# Altium PCB Copy of PCB1.PcbDoc
Units mm, origin at the board's own origin, x right, y up, seen from the top; angles counter-clockwise.
Board outline 71.25 x 85.34 mm, 2 copper layers (Top Layer, Bottom Layer); 17 components, 27 nets, 119 pads, 0 vias.
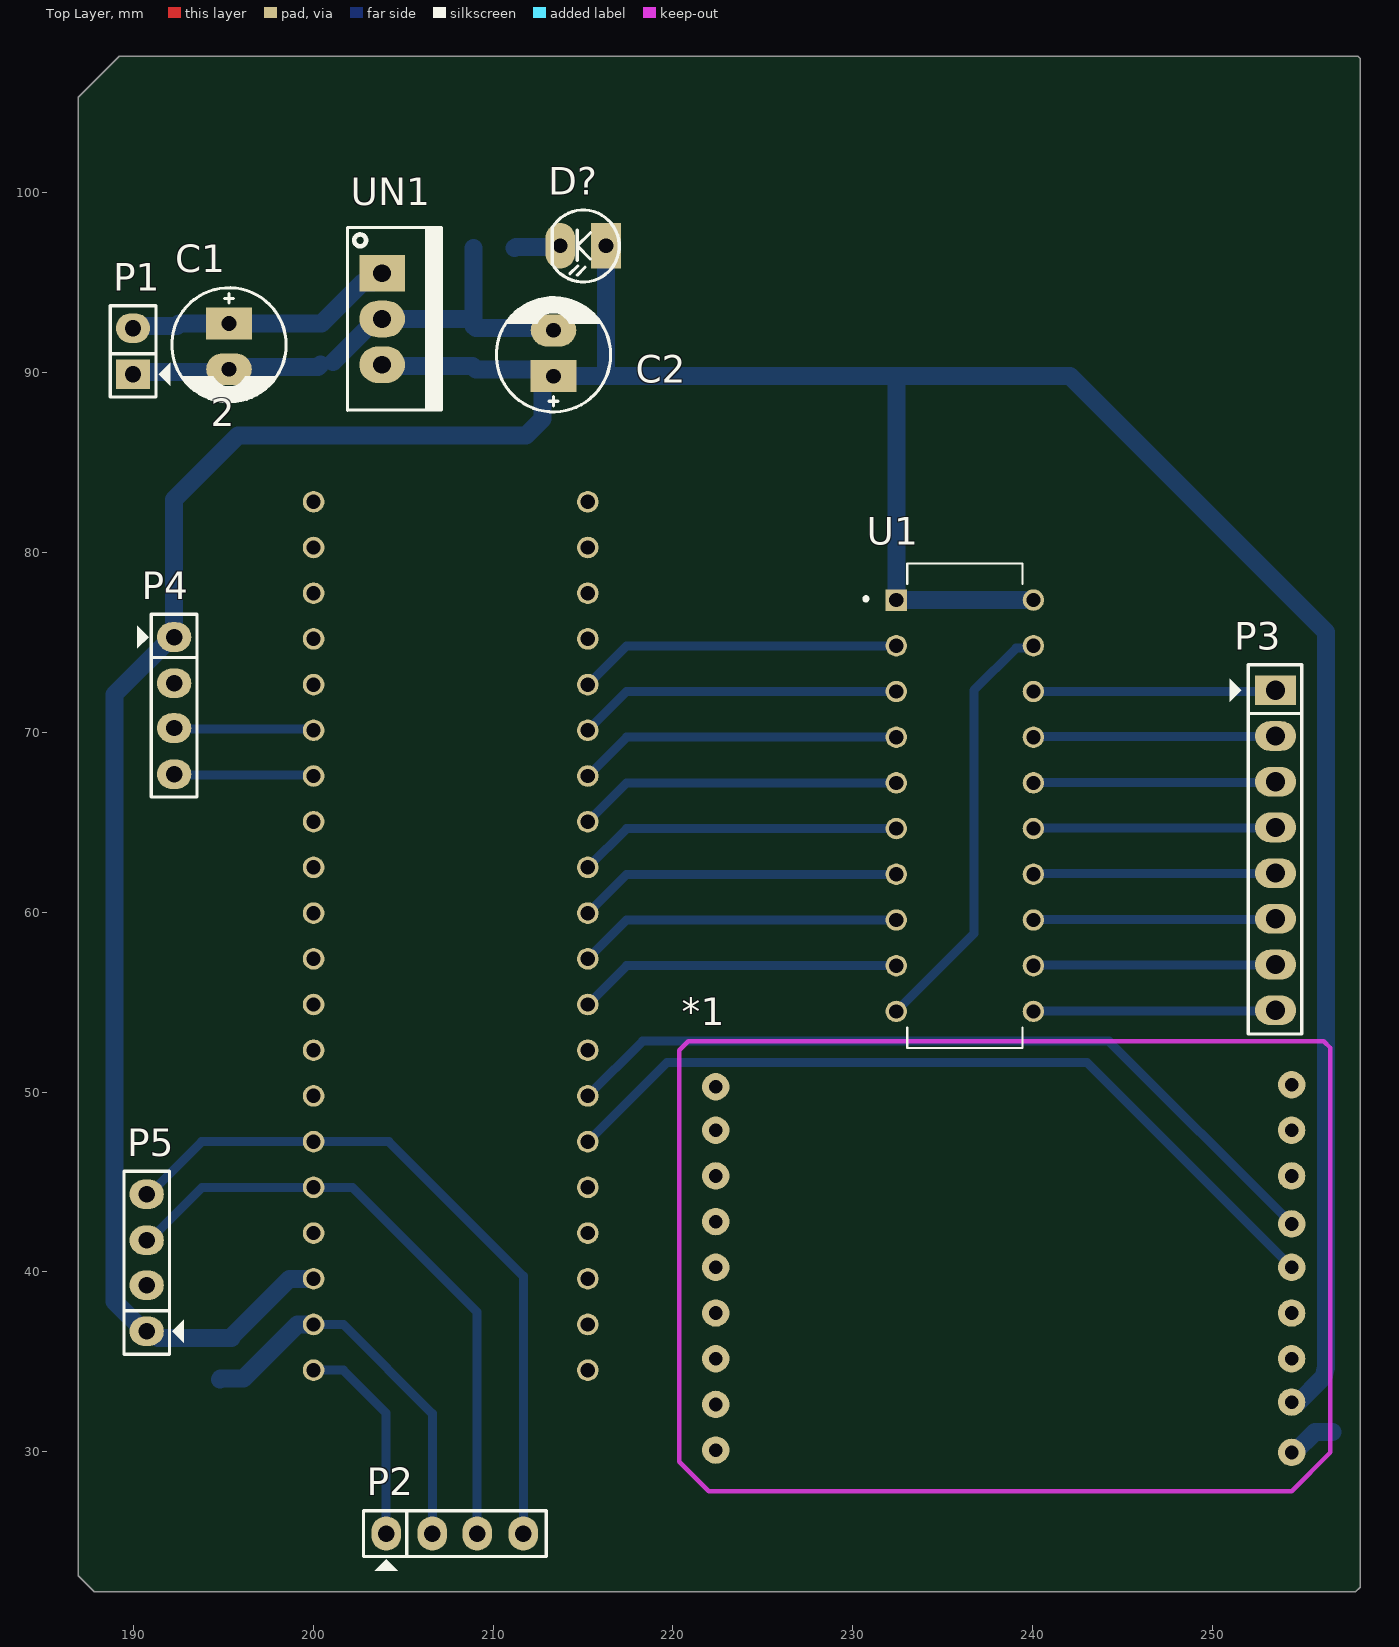
[diagram p0: Top Layer view]
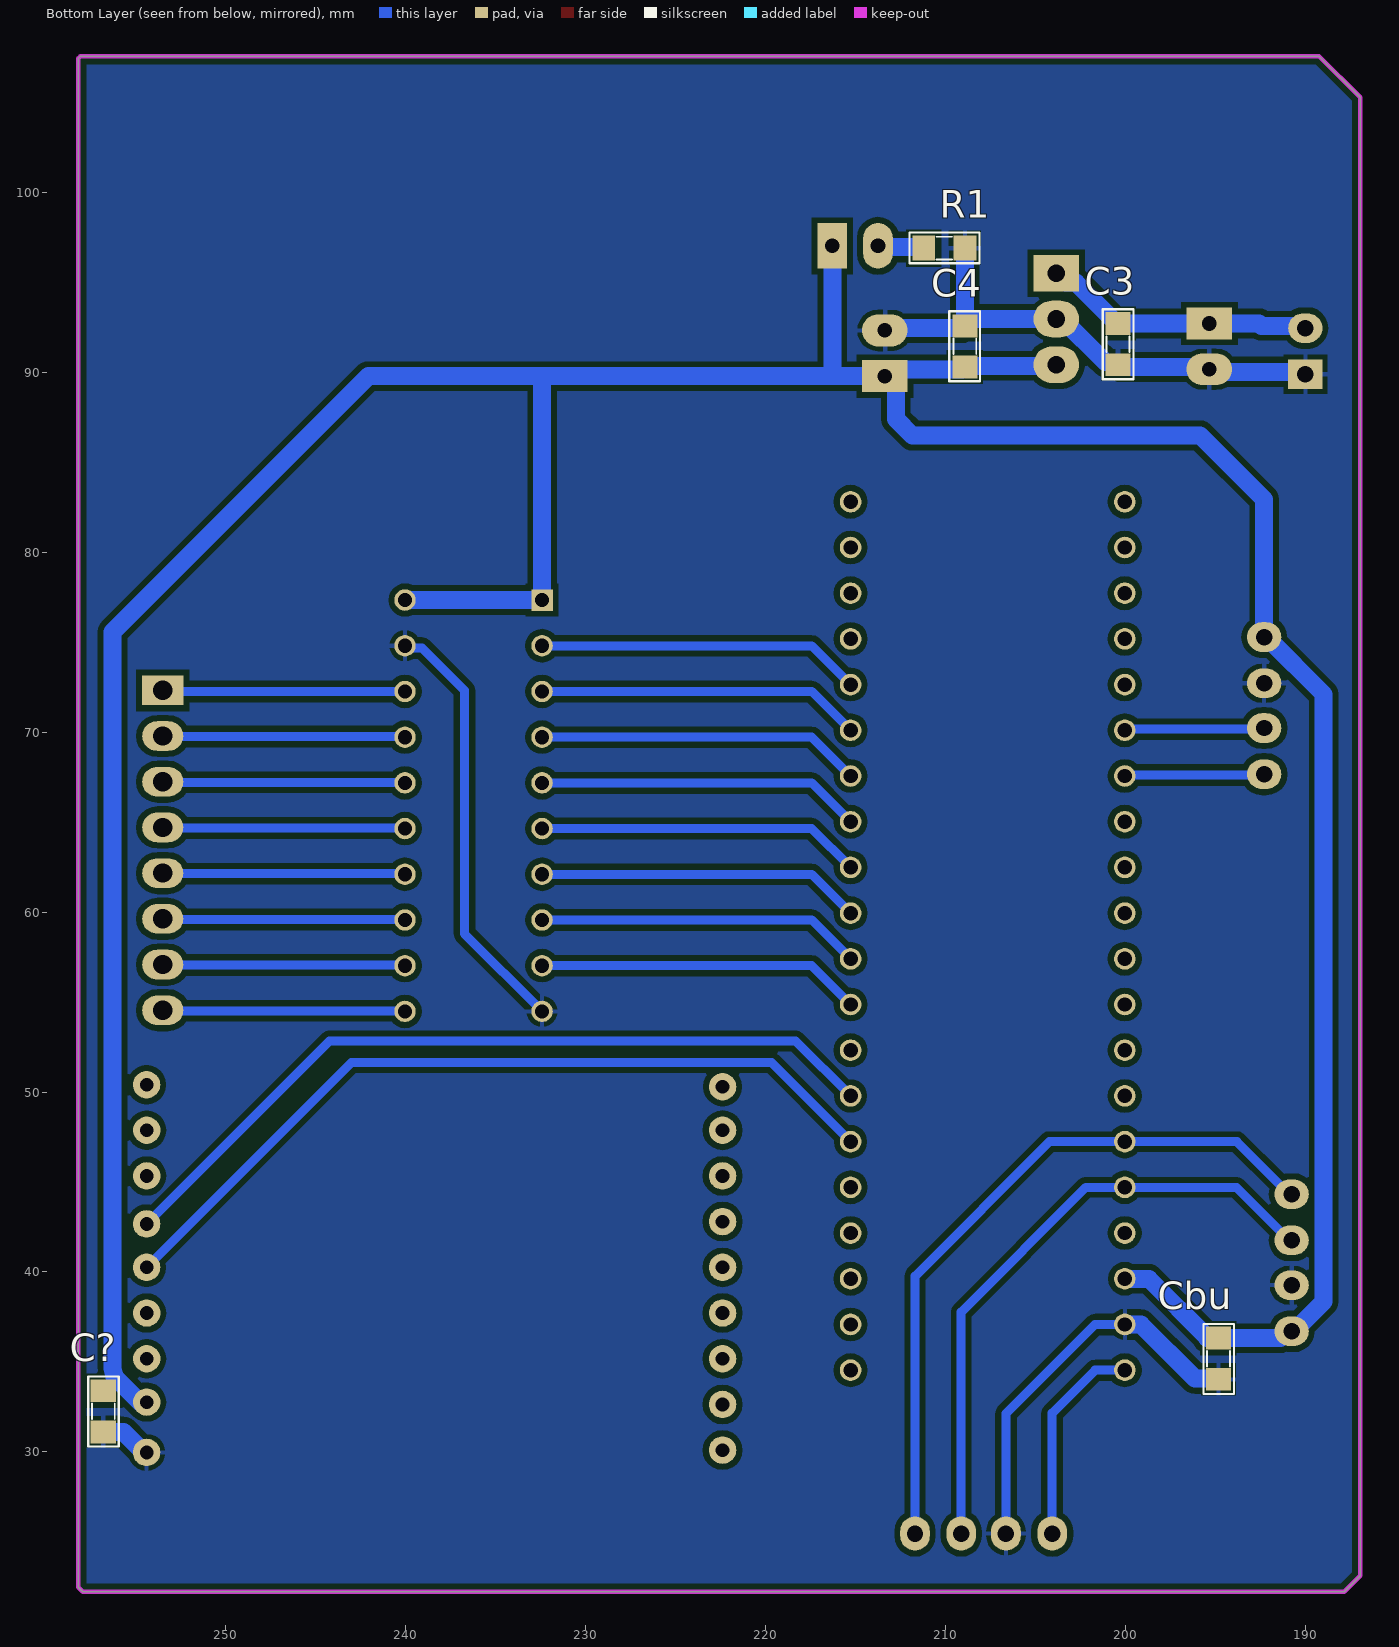
[diagram p1: Bottom Layer view, seen from below]

## Layer stack, top to bottom
Top Solder: solder mask 0.0102, Solder Resist, Dk 3.5
Top Layer: signal copper 0.0356
Dielectric 1: dielectric 0.32, FR-4, Dk 4.8
Bottom Layer: signal copper 0.0356
Bottom Solder: solder mask 0.0102, Solder Resist, Dk 3.5

## Board outline
186.944,23.114 187.833,22.225 257.937,22.225 258.191,22.479 258.191,107.442 258.064,107.569 189.23,107.569 186.944,105.283

## Design rules (kind name [scope] priority, off if disabled: settings)
Clearance [All] p1: gap=0.33 ignorepadtopadclearanceinfootprint=FALSE
PolygonConnect [All] p1: connectstyle=Relief reliefconductorwidth=0.254 reliefentries=4 polygonreliefangle="90 Angle" airgapwidth=0.254
RoutingVias [All] p1: holewidth=0.711 width=1.27 viastyle="Through Hole" minholewidth=0.711 minwidth=1.27 maxholewidth=0.711 maxwidth=1.27
SolderMaskExpansion [All] p1: expansion=0.102
Width [All] p1: maxlimit=1 minlimit=0.254 preferedwidth=0.5 toplayer_maxwidth=0.254 toplayer_prefwidth=0.254 bottomlayer_minwidth=0.33 minimp=50.000000 maximp=50.000000 favimp=50.000000
30 further rules are at their usual default settings.

## Classes and differential pairs
component class Sheet1: 2 C1 C2 C3 C4 C? Cbu D? P1 P2 P3 P4 P5 R1 U1 UN1

## Components (designator, comment, footprint, x,y, rotation, side; value= is the part's Value field where it differs from the comment)
2 "BLUE_PILL" BLUE_PILL 207.645,67.564 r0 top
*1 "Component_1" PCBComponent_1 221.107,29.972 r0 top
C1 "Cap Pol" CP1/2.5 195.326,92.71 r270 top value=100uF
C2 "Cap Pol" CP1/2.5 213.36,89.789 r90 top value=100uF
C3 "Cap Non-Pol SMD" CAP-SM-0805 200.406,90.424 r90 bottom value=100pF
C4 "Cap Non-Pol SMD" CAP-SM-0805 208.915,92.583 r270 bottom value=100pF
C? "Cap Non-Pol SMD" CAP-SM-0805 256.794,31.115 r90 bottom value=100nF
Cbu "Cap Non-Pol SMD" CAP-SM-0805 194.818,34.036 r90 bottom value=100nF
D? "LED" LED-3mm 216.281,97.028 r180 top
P1 "Header 2" JP2 189.992,89.891 r90 top
P2 "Header 4" JP4 206.604,25.463 r0 top
P3 "Header 8" JP8 253.492,72.326 r270 top
P4 "Header 4" JP4 192.278,72.746 r270 top
P5 "Header 4" JP4 190.754,39.243 r90 top
R1 "RESISTOR SMD" RES-SM-0805 208.915,96.901 r0 bottom value=220R
U1 "74HC245N" *DIP762W45P254L2692H420Q20 236.22,65.913 r0 top
UN1 "LM7805" QTO-220 203.835,95.504 r270 top

## Footprints (in the part's own frame and the unit in brackets; to place one, negate y for a bottom-side part, rotate by r counter-clockwise, add the part's x,y. Pads: shape width x height; smd on the part's side, far side on the other; paste and mask are expansions set on the pad)
*DIP762W45P254L2692H420Q20 [mm]
  rect 1.19x1.19 hole 0.79: 1(-3.81,11.43)
  round 1.19 hole 0.79: 2(-3.81,8.89) 3(-3.81,6.35) 4(-3.81,3.81) 5(-3.81,1.27) 6(-3.81,-1.27) 7(-3.81,-3.81) 8(-3.81,-6.35) 9(-3.81,-8.89) 10(-3.81,-11.43) 11(3.81,-11.43) 12(3.81,-8.89) 13(3.81,-6.35) 14(3.81,-3.81) 15(3.81,-1.27) 16(3.81,1.27) 17(3.81,3.81) 18(3.81,6.35) 19(3.81,8.89) 20(3.81,11.43)
  silkscreen extent -5.6,-13.46 3.2,13.46
BLUE_PILL [mil]
  round 47.25 / inner round 60 / far side round 47.25 hole 31.5: P$1(-300,600) P$2(-300,500) P$3(-300,400) P$4(-300,300) P$5(-300,200) P$6(-300,100) P$7(-300,0) P$8(-300,-100) P$9(-300,-200) P$10(-300,-300) P$11(-300,-400) P$12(-300,-500) P$13(-300,-600) P$14(-300,-700) P$15(-300,-800) P$16(-300,-900) P$17(-300,-1000) P$18(-300,-1100) P$19(-300,-1200) P$20(-300,-1300) P$21(300,600) P$22(300,500) P$23(300,400) P$24(300,300) P$25(300,200) P$26(300,100) P$27(300,0) P$28(300,-100) P$29(300,-200) P$30(300,-300) P$31(300,-400) P$32(300,-500) P$33(300,-600) P$34(300,-700) P$35(300,-800) P$36(300,-900) P$37(300,-1000) P$38(300,-1100) P$39(300,-1200) P$40(300,-1300)
  body extent -455,-1533 445,835, height 385
CAP-SM-0805 [mil]
  rect 50x55 smd: 1(0,0) 2(90,0)
  silkscreen extent -32,-34 121,33, body extent 6,-25 84,25, height 31
CP1/2.5 [mil] "Tu hoa 33 >100 uF,50V, 220uF/16V,25V"
  rect 70x100 hole 32: 1(0,0)
  oval 70x100 hole 32: 2(100,0)
  silkscreen extent -78,-125 172,125, body extent -76,-124 172,124, height 422
JP2 [mil]
  rect 65x75 hole 36: 1(0,0)
  oval 65x75 hole 36: 2(101,0)
  silkscreen extent -50,-81 150,50, body extent -48,-50 148,48, height 323
JP4 [mil] "Jumper 4"
  oval 65x75 hole 36: 1(-100,0) 2(1,0) 3(99,0) 4(200,0)
  silkscreen extent -150,-81 250,50, body extent -148,-48 248,50, height 323
JP8 [mil] "JP8"
  rect 65x90 hole 42: 1(0,0)
  oval 65x90 hole 42: 2(100,0) 3(200,0) 4(300,0) 5(400,0) 6(500,0) 7(600,0) 8(700,0)
  silkscreen extent -56,-100 752,57, body extent -48,-50 748,48, height 323
LED-3mm [mil] "LED 2 PIN, 3ly Only colour"
  rect 65x100 hole 32: 1(0,0)
  oval 65x100 hole 32: 2(100,0)
  silkscreen extent -29,-78 118,79, body extent -25,-75 113,75, height 217
PCBComponent_1 [mil]
  round 60 hole 30: 1(50,800) 2(50,705) 3(50,605) 4(50,505) 5(50,405) 6(50,305) 7(50,205) 8(50,105) 9(50,5) 10(1310.24,804.52) 11(1310,705) 12(1310,605) 13(1310.24,500) 14(1310.24,405) 15(1310,305) 16(1310,205) 17(1310,110) 18(1310.24,0)
  Top Layer keep-out lines w10: -30,-20 35,-85 1310,-85 1395,0 1395,885 1380,900 5,900 -10,900 -30,880 -30,875 -30,865 -30,-20
QTO-220 [mil] "TO-220 - 1-2-3"
  rect 80x100 hole 39: 1(0,0)
  oval 80x100 hole 39: 2(100,0) 3(200,0)
  silkscreen extent -100,-76 300,130, body extent -119,-64 322,121, height 755
RES-SM-0805 [mil]
  rect 50x55 smd: 1(0,0) 2(90,0)
  silkscreen extent -32,-34 121,33, body extent 6,-25 84,25, height 31

## Part data
C1 C2: "Polarized Capacitor (Radial)"
C3 C4 C? Cbu: "Capacitor"
P1: "Header, 2-Pin", LatestRevisionDate=17-Jul-2002, LatestRevisionNote="Re-released for DXP Platform.", Publisher="Altium Limited"
P2 P4 P5: "Header, 4-Pin", LatestRevisionDate=17-Jul-2002, LatestRevisionNote="Re-released for DXP Platform.", Publisher="Altium Limited"
P3: "Header, 8-Pin", LatestRevisionDate=17-Jul-2002, LatestRevisionNote="Re-released for DXP Platform.", Publisher="Altium Limited"
R1: "Resistor"
U1: "20pin Dip/Pkg Tri-State Octal Bus Transceiver", Package="DIP-20 NXP Semiconductors", Availability=Unavailable, MF="NXP Semiconductors", MP=74HC245N, Price=None, SnapEDA_Link=https://www.snapeda.com/parts/74HC245N/NXP%20Semiconductors/view-part/?ref=snap
UN1: "Positive Voltage Regulator"
2: DeviceSetName=BLUE_PILL, GateName_1=G$1, LibraryName=BluePill, Package=BLUE_PILL, SymbolName_1=BLUE_PILL

## Nets (pads, with @x,y where several pads share a name; then routed paths per layer and width w, separated by ;. In a path a pad name is that pad's centre, name@x,y a point inside that pad or via, vN(x,y) a via of type N, cw(c..) or ccw(c..) an arc to the next point about the centre after c; other vN are vias at no path point)
3.3v: 2.P$20 P2.1 | length 11.7
  Bottom Layer w0.5: 2.P$20 201.676,34.544 204.064,32.156 P2.1
5v: 2.P$18 *1.17 C2.1 C4.2 C?.2 Cbu.2 D?.1 P4.1 P5.1 U1.1 U1.20 UN1.3 | length 214.3
  Bottom Layer w0.5: *1.17 *1.17@254.704,32.708
  Bottom Layer w1: 2.P$18 198.69,39.624 195.453,36.387 195.453,36.322 Cbu.2 191.373,36.322 190.992,36.703 P5.1 190.627,36.703 188.971,38.359 188.971,72.106 192.151,75.286 P4.1 192.278,82.931 195.834,86.487 211.836,86.487 212.749,87.4 212.749,89.4 213.138,89.789 C2.1 ; UN1.3 203.898,90.361 208.851,90.361 C4.2 209.05,90.162 212.987,90.162 C2.1 ; D?.1 216.281,90.043 216.535,89.789 ; U1.20 U1.1 232.41,89.599 232.22,89.789 ; *1.17@254.704,32.708 256.159,34.163 256.286,34.671 256.286,75.565 242.062,89.789 232.22,89.789 ; C2.1 216.535,89.789 ; 216.535,89.789 232.22,89.789
9v: C1.1 C3.2 P1.2 UN1.1 | length 15.1
  Bottom Layer w1: P1.2 190.117,92.581 192.427,92.581 192.556,92.71 C1.1 C3.2 200.469,92.71 202.748,94.988 203.319,94.988 UN1.1
GND: 2.P$19 *1.18 C1.2 C2.2 C3.1 C4.1 C?.1 Cbu.1 P1.1 P2.2 P4.2 P5.2 R1.1 U1.10 U1.19 UN1.2 | length 76.4
  Bottom Layer w0.5: 2.P$19 201.676,37.084 206.629,32.131 P2.2 ; U1.10 236.728,58.801 236.728,72.326 239.072,74.671 239.898,74.671 U1.19
  Bottom Layer w1: P1.1 190.132,90.03 195.186,90.03 C1.2 195.453,90.297 200.279,90.297 C3.1 ; Cbu.1 194.857,34.075 196.127,34.075 199.136,37.084 2.P$19 ; 201.105,90.559 203.51,92.964 UN1.2 C4.1@208.47,92.964 ; R1.1 C4.1 209.042,92.456 213.233,92.456 C2.2 ; *1.18 254.529,29.972 255.672,31.115 C?.1@256.667,31.115
IN1: 2.P$27 U1.4 | length 18
  Bottom Layer w0.5: 2.P$27 217.424,69.723 U1.4
IN2: 2.P$28 U1.5 | length 18
  Bottom Layer w0.5: 2.P$28 217.424,67.183 U1.5
IN3: 2.P$29 U1.6 | length 18
  Bottom Layer w0.5: 2.P$29 217.424,64.643 U1.6
IN4: 2.P$30 U1.7 | length 18
  Bottom Layer w0.5: 2.P$30 217.424,62.103 U1.7
NetD?_2: D?.2 R1.2 | length 2.6
  Bottom Layer w1: R1.2 211.264,96.965 213.677,96.965 D?.2
NetP3_1: P3.1 U1.18 | length 13.5
  Bottom Layer w0.5: U1.18 253.428,72.263 P3.1
NetP3_2: P3.2 U1.17 | length 13.5
  Bottom Layer w0.5: U1.17 240.062,69.755 253.46,69.755 P3.2
NetP3_3: P3.3 U1.16 | length 13.5
  Bottom Layer w0.5: U1.16 240.062,67.215 253.46,67.215 P3.3
NetP3_4: P3.4 U1.15 | length 13.5
  Bottom Layer w0.5: U1.15 240.062,64.675 253.46,64.675 P3.4
NetP3_5: P3.5 U1.14 | length 13.5
  Bottom Layer w0.5: U1.14 240.062,62.135 253.46,62.135 P3.5
NetP3_6: P3.6 U1.13 | length 13.5
  Bottom Layer w0.5: U1.13 240.062,59.595 253.46,59.595 P3.6
NetP3_7: P3.7 U1.12 | length 13.5
  Bottom Layer w0.5: U1.12 240.062,57.055 253.46,57.055 P3.7
NetP3_8: P3.8 U1.11 | length 13.5
  Bottom Layer w0.5: U1.11 240.062,54.515 253.46,54.515 P3.8
PA4: 2.P$32 U1.9 | length 18
  Bottom Layer w0.5: 2.P$32 217.424,57.023 U1.9
PA5: 2.P$31 U1.8 | length 18
  Bottom Layer w0.5: 2.P$31 217.424,59.563 U1.8
PWM1: 2.P$25 U1.2 | length 18
  Bottom Layer w0.5: 2.P$25 217.424,74.803 U1.2
PWM2: 2.P$26 U1.3 | length 18
  Bottom Layer w0.5: 2.P$26 217.424,72.263 U1.3
RX1: 2.P$7 P4.4 | length 7.8
  Bottom Layer w0.5: P4.4 192.329,67.615 199.974,67.615 2.P$7
RX2: 2.P$35 *1.14 | length 45.9
  Bottom Layer w0.254: 2.P$35 2.P$35@215.265,47.498
  Bottom Layer w0.5: 2.P$35 215.392,47.371 219.655,51.634 243.012,51.634 *1.14
SCL1: 2.P$16 P2.3 P5.3 | length 35.2
  Bottom Layer w0.5: P5.3@190.436,41.758 P5.3 190.881,41.758 193.827,44.704 2.P$16 202.184,44.704 209.118,37.77 P2.3 P2.3@209.055,25.4
SDA1: 2.P$15 P2.4 P5.4 | length 39.7
  Bottom Layer w0.5: P5.4 190.881,44.323 193.802,47.244 2.P$15 204.216,47.244 211.684,39.776 P2.4 P2.4@211.607,25.387
TX1: 2.P$6 P4.3 | length 7.8
  Bottom Layer w0.5: P4.3 192.341,70.168 199.962,70.168 2.P$6
TX2: 2.P$34 *1.13 | length 44.6
  Bottom Layer w0.5: 2.P$34 218.313,52.832 244.227,52.832 *1.13
pads on no net: 2.P$1 2.P$2 2.P$3 2.P$4 2.P$5 2.P$8 2.P$9 2.P$10 2.P$11 2.P$12 2.P$13 2.P$14 2.P$17 2.P$21 2.P$22 2.P$23 2.P$24 2.P$33 2.P$36 2.P$37 2.P$38 2.P$39 2.P$40 *1.1 *1.2 *1.3 *1.4 *1.5 *1.6 *1.7 *1.8 *1.9 *1.10 *1.11 *1.12 *1.15 *1.16

## Polygon pours and split planes (outlines as drawn)
GND on Bottom Layer "Top Layer-No Net" (solid, remove dead copper, pour order 2): 186.944,23.114 187.833,22.225 257.937,22.225 258.191,22.479 258.191,107.442 258.064,107.569 189.23,107.569 186.944,105.283

## Keep-outs
Bottom Layer:
  the board outline again, w0.254

## Text inside footprints (layer, text, board x,y; h text height)
2: Mechanical 7 "STM32" at 205.74,56.134 h1.97 r46.6